# Altium PCB STLINK.PcbDoc
Units mil, origin at the board's own origin, x right, y up, seen from the top; angles counter-clockwise.
Board outline 1677.17 x 669.29 mil, 2 copper layers (Top Layer, Bottom Layer); 30 components, 29 nets, 121 pads, 35 vias.
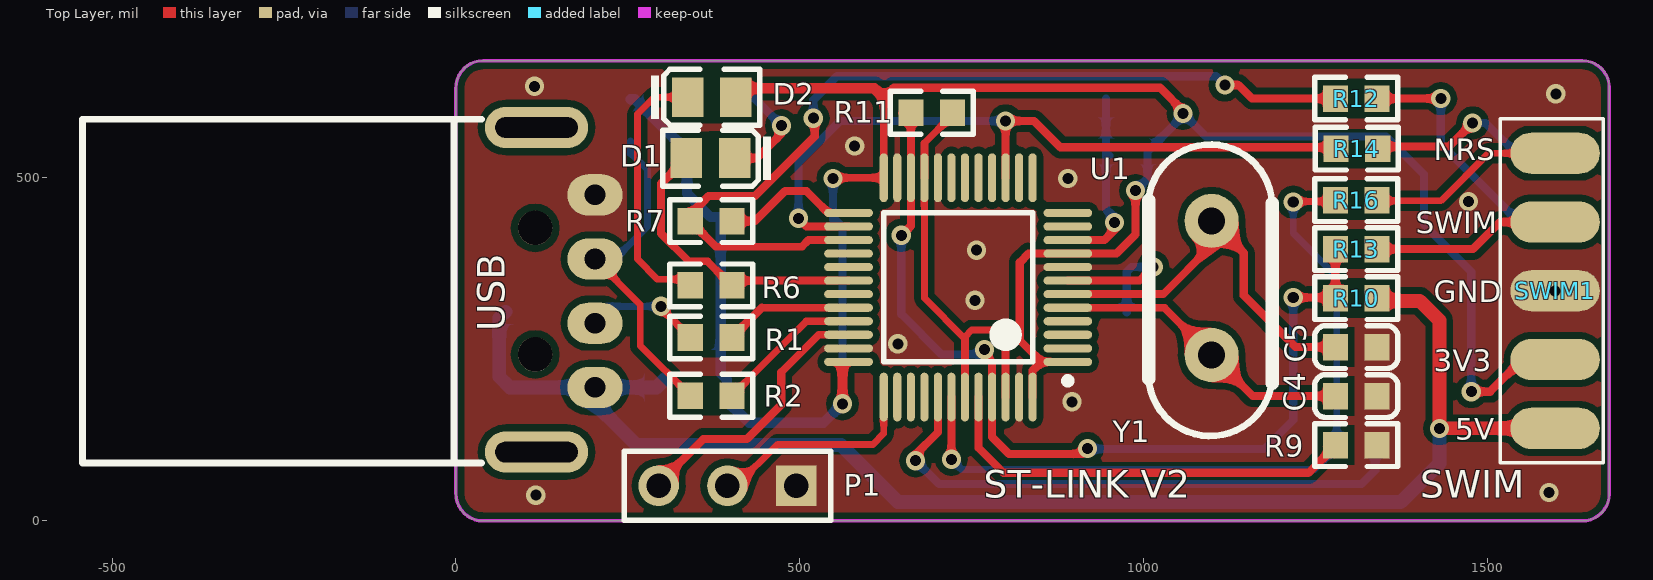
[diagram p0: Top Layer view]
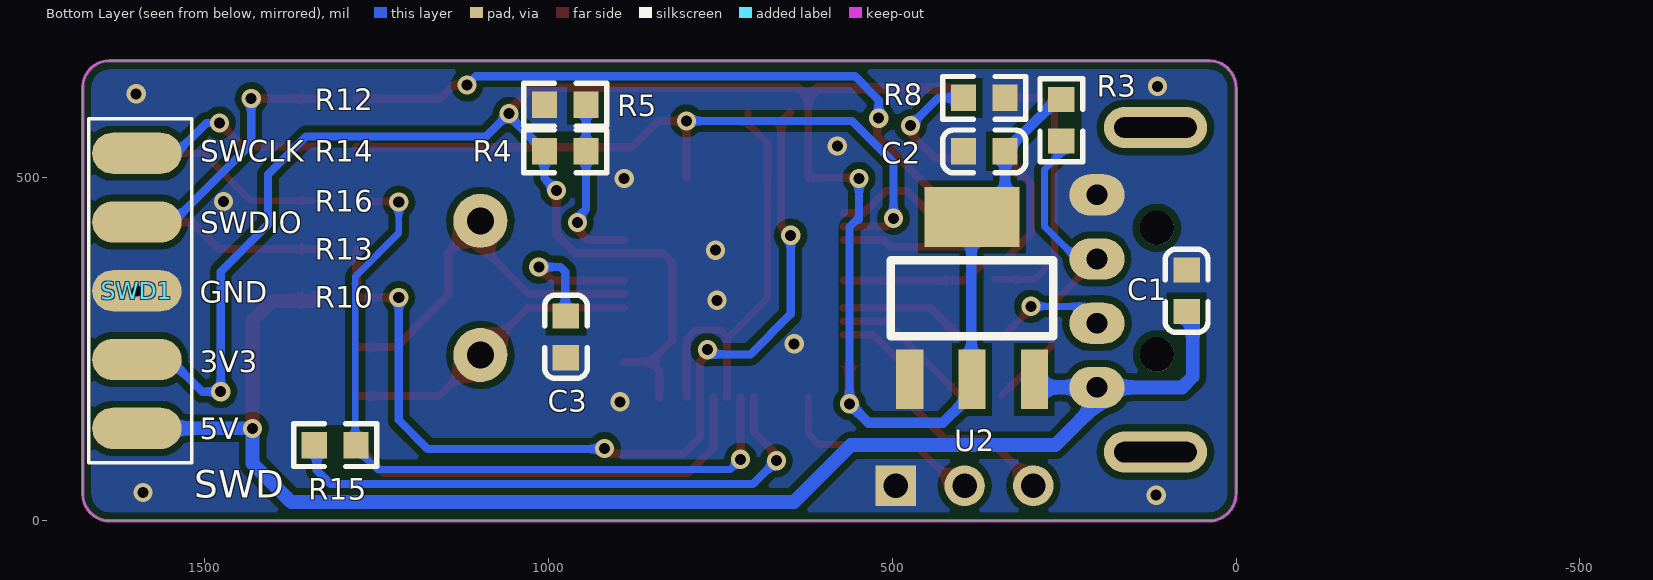
[diagram p1: Bottom Layer view, seen from below]
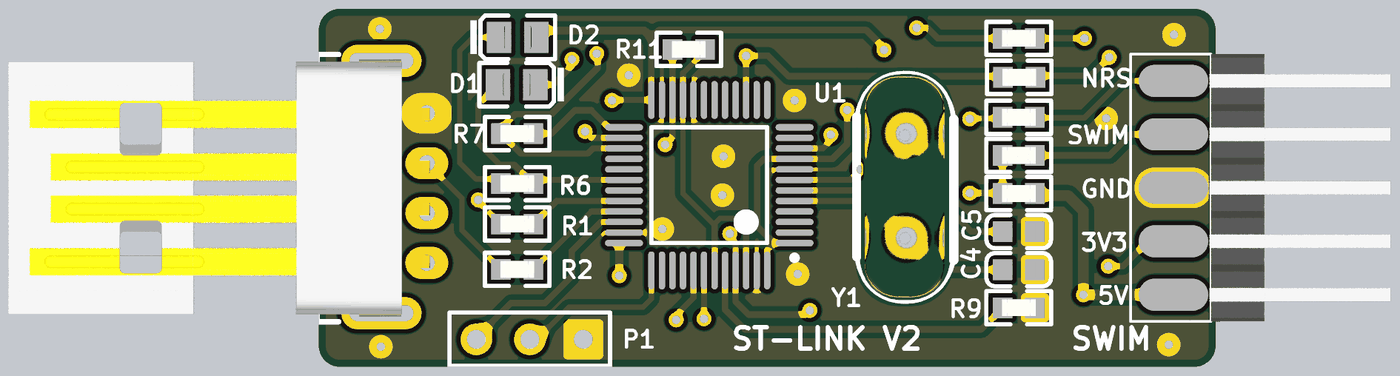
[diagram p2: 3D render of the assembled board from above, using the file's embedded part models]
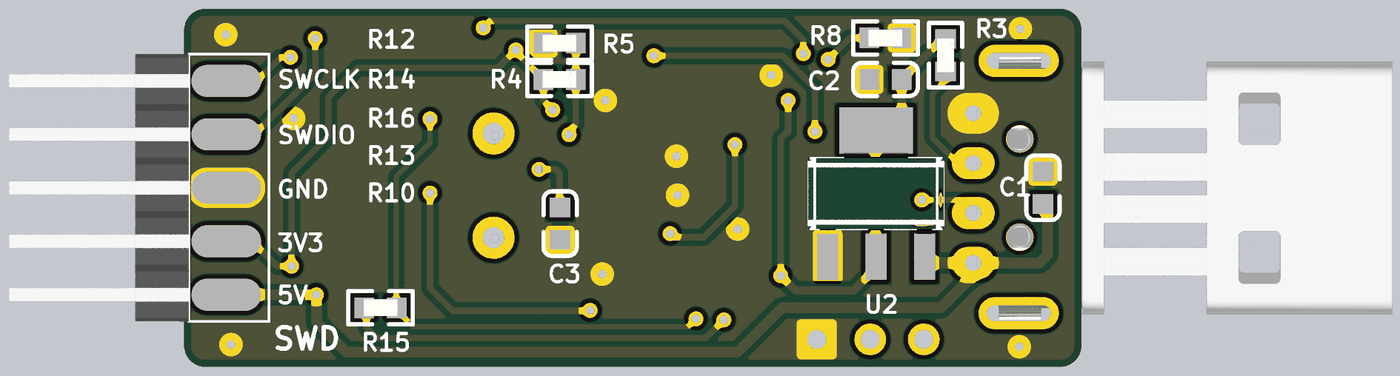
[diagram p3: 3D render of the assembled board from below, using the file's embedded part models]

## Layer stack, top to bottom
Top Solder: solder mask 0.4, Solder Resist, Dk 3.5
Top Layer: signal copper 1.4
Dielectric1: dielectric 12.6, FR-4, Dk 4.8
Bottom Layer: signal copper 1.4
Bottom Solder: solder mask 0.4, Solder Resist, Dk 3.5

## Board outline
0,39.37 ccw(c39.37,39.37) 39.37,0 1637.8,0 ccw(c1637.8,39.37) 1677.17,39.37 1677.17,629.92 ccw(c1637.8,629.92) 1637.8,669.29 39.37,669.29 ccw(c39.37,629.92) 0,629.92

## Design rules (kind name [scope] priority, off if disabled: settings)
Clearance [All] p1: gap=8 ignorepadtopadclearanceinfootprint=TRUE
ComponentClearance [All] p1: gap=0 collisioncheckmode=3 verticalgap=0 showdistances=FALSE
HoleSize [All] p1: absolutevalues=TRUE maxlimit=200 minlimit=1 maxpercent=80.000 minpercent=20.000
HoleToHoleClearance [All] p1: gap=10 allowstackedmicrovias=FALSE
MinimumSolderMaskSliver [All] p1: minsoldermaskwidth=2
PlaneClearance [All] p1: clearance=6
PlaneConnect [All] p1: planeconnectstyle=Direct reliefexpansion=20 reliefentries=4 reliefconductorwidth=10 reliefairgap=10
PolygonConnect [All] p1: connectstyle=Direct reliefconductorwidth=10 reliefentries=4 polygonreliefangle="90 Angle" airgapwidth=10
RoutingVias [All] p1: holewidth=16 width=28 viastyle="Through Hole" minholewidth=0 minwidth=0 maxholewidth=28 maxwidth=80
SilkToSilkClearance [All] p1: silktosilkclearance=4
SilkToSolderMaskClearance [IsPad] p1: minsilkscreentomaskgap=0 clearancetoexposedcopper=TRUE
SolderMaskExpansion [All] p1: expansion=8
Width [All] p1: maxlimit=50 minlimit=10 preferedwidth=12 minimp=50.000000 maximp=50.000000 favimp=50.000000
22 further rules are at their usual default settings.

## Components (designator, comment, footprint, x,y, rotation, side; value= is the part's Value field where it differs from the comment)
C1 "104" 0603_C 71.85,334.65 r270 bottom
C2 "104" 0603_C 366.14,537.4 r180 bottom
C3 "104" 0603_C 974.41,267.72 r90 bottom
C4 "22pf" 0603_C 1309.06,181.5 r180 top value=22p
C5 "22pf" 0603_C 1309.06,252.76 r180 top value=22p
D1 "红灯 0805" LC-0805_LED_S1 370.08,527.56 r180 top
D2 "绿灯 0805" LC-0805_LED_S1 372.05,616.14 r0 top
P1 "ST-LINK" HDR1X3 494.69,51.18 r180 top
R1 "22R" 0603_R 371.06,266.73 r0 top value=22
R2 "22R" 0603_R 371.06,182.09 r0 top value=22
R3 "1.5k" 0603_R 253.94,582.68 r90 bottom
R4 "4.7k" 0603_R 975.39,537.4 r0 bottom
R5 "4.7k" 0603_R 975.39,605.32 r180 bottom
R6 "1.5k" 0603_R 371.06,342.52 r0 top
R7 "100R" 0603_R 371.06,436.02 r0 top value=100
R8 "1.5k" 0603_R 366.14,615.16 r0 bottom
R9 "10k" 0603_R 1309.06,110.24 r180 top
R10 "1.5k" 0603_R 1309.06,324.02 r180 top
R11 "1k" 0603_R 691.93,593.5 r180 top
R12 "22R" 0603_R 1309.06,614.17 r180 top value=22
R13 "22R" 0603_R 1309.06,395.28 r180 top value=22
R14 "22R" 0603_R 1310.04,541.34 r180 top value=22
R15 "1k" 0603_R 1310.04,110.24 r180 bottom
R16 "22R" 0603_R 1309.06,466.54 r180 top value=22
SWD1 "Head5" "HEADER 5" 1598.43,534.65 r270 bottom
SWIM1 "Header 5" "HEADER 5" 1598.43,134.65 r90 top
U1 "STM32F103C8T6" LQFP48_N 730.31,339.57 r180 top
U2 "AMS1117-3.3" SOT-223 383.86,323.82 r270 bottom
USB "USB" USB_A_G 197.16,484.12 r270 top (schematic designator USB?)
Y1 "8M晶振" XTAL_2 1097.44,351.38 r270 top

## Footprints (in the part's own frame and the unit in brackets; to place one, negate y for a bottom-side part, rotate by r counter-clockwise, add the part's x,y. Pads: shape width x height; smd on the part's side, far side on the other; paste and mask are expansions set on the pad)
0603_C [mm]
  rect 0.93x0.98 smd: 1(-0.77,0) 2(0.77,0)
  silkscreen extent -1.54,-0.79 1.54,0.79, body extent -0.8,-0.4 0.8,0.4, height 0.3
0603_R [mm]
  rect 0.93x0.98 smd: 1(-0.77,0) 2(0.77,0)
  silkscreen extent -1.53,-0.79 1.54,0.79, body extent -0.85,-0.4 0.85,0.4, height 0.56
HDR1X3 [mm] "Connector; Header; 3 Position"
  rect 1.5x1.5 hole 0.9: 1(0,0)
  round 1.5 hole 0.9: 2(2.54,0) 3(5.08,0)
  silkscreen extent -1.27,-1.27 6.35,1.27
"HEADER 5" [mil]
  oval 60x130 smd: 1(0,0) 2(100,0) 3(200,0) 4(300,0) 5(400,0)
  silkscreen extent -50,-70 450,80, body extent -50,-406 450,48, height 70
LC-0805_LED_S1 [mm]
  rect 1.16x1.47 smd: A(0.89,0) K(-0.89,0)
  silkscreen extent -2.24,-1.03 1.77,1.04, body extent -1.01,-0.62 1.01,0.62, height 1.1
LQFP48_N [mm] "Thin QFP, 48-Leads, Body 7x7mm, Pitch 0.5mm, IPC Medium Density"
  oval 1.8x0.3 smd: 1(-4.05,2.75) 2(-4.05,2.25) 3(-4.05,1.75) 4(-4.05,1.25) 5(-4.05,0.75) 6(-4.05,0.25) 7(-4.05,-0.25) 8(-4.05,-0.75) 9(-4.05,-1.25) 10(-4.05,-1.75) 11(-4.05,-2.25) 12(-4.05,-2.75) 25(4.05,-2.75) 26(4.05,-2.25) 27(4.05,-1.75) 28(4.05,-1.25) 29(4.05,-0.75) 30(4.05,-0.25) 31(4.05,0.25) 32(4.05,0.75) 33(4.05,1.25) 34(4.05,1.75) 35(4.05,2.25) 36(4.05,2.75)
  oval 0.3x1.8 smd: 13(-2.75,-4.05) 14(-2.25,-4.05) 15(-1.75,-4.05) 16(-1.25,-4.05) 17(-0.75,-4.05) 18(-0.25,-4.05) 19(0.25,-4.05) 20(0.75,-4.05) 21(1.25,-4.05) 22(1.75,-4.05) 23(2.25,-4.05) 24(2.75,-4.05) 37(2.75,4.05) 38(2.25,4.05) 39(1.75,4.05) 40(1.25,4.05) 41(0.75,4.05) 42(0.25,4.05) 43(-0.25,4.05) 44(-0.75,4.05) 45(-1.25,4.05) 46(-1.75,4.05) 47(-2.25,4.05) 48(-2.75,4.05)
  silkscreen extent -4.18,-2.75 2.75,3.57, body extent -3.5,-3.5 3.5,3.5, height 1.6
SOT-223 [mm]
  rect 2.2x1 smd: 1(3,-2.3) 2(3,0) 3(3,2.3)
  rect 2.2x3.5 smd: 2(-3,0)
  silkscreen extent -1.4,-3 1.4,3, body extent -3.49,-3.24 3.49,3.24, height 1.64
USB_A_G [mil]
  oval 60x80 hole 30: 1(10,5) 2(103.33,5) 3(196.66,5) 4(290,5)
  oval 60x150 hole 30 slot 120 at 90 deg: 5(-88,-80) 6(384,-80)
  round 50 hole 50: 7(58,-82) 8(242,-82)
  silkscreen extent -100,-740 400,-160, body extent -96,-778 396,10, height 178
XTAL_2 [mm]
  round 2 hole 1: 1(-2.157,0.035) 2(2.796,0.035)
  silkscreen extent -4.98,-2.3 5.79,2.27, body extent -5.29,-2.36 6.06,2.29, height 3.5

## Part data
C1 C2 C3 C4 C5: library part Cap
D1 D2: library part "0805 蓝灯", "发光二极管", Package=0805, SuppliersPartNumber=C2293, ComponentLink1Description=供应商链接, ComponentLink1URL=http://www.szlcsc.com/product/details_2666.html, Supplier=LC
P1: library part "Header 3", "Header, 3-Pin", LatestRevisionDate=17-Jul-2002, LatestRevisionNote="Re-released for DXP Platform.", Publisher="Altium Limited"
R1 R2 R3 R4 R5 R6 R7 R8 R9 R10 R11 R12 R13 R14 R15 R16: library part RES
SWD1: library part "HEAD 5"
SWIM1: "Header, 5-Pin", LatestRevisionDate=17-Jul-2002, LatestRevisionNote="Re-released for DXP Platform.", Publisher="Altium Limited"
U1: "STM32 ARM-based 32-bit MCU with 64 Kbytes Flash, 48-pin LQFP, Industrial Temperature", ComponentLink1Description="Manufacturer Link", ComponentLink1URL=www.st.com/stm32, ComponentLink2Description=Datasheet, ComponentLink2URL=http://www.st.com/stonline/products/literature/ds/13587.pdf, DatasheetVersion="rev6, Mar-2008", PackageDescription="48-Pin Low-Profile Quad Flat Pack, 7 x 7 mm Body, 0.5 mm Pitch (LQFP48)", PackageReference=LQFP48, PackageVersion=Mar-2008, Published=30-May-2008, Publisher="Altium Limited"
U2: library part AMS1117-XX, "AMS   800mA LOW DROPOUT VOLTAGE REGULATOR"
USB: library part USB_G
Y1: library part XTAL

## Via types
v1: diameter 28, hole 16, Top Layer to Bottom Layer, 35 vias

## Nets (pads, with @x,y where several pads share a name; then routed paths per layer and width w, separated by ;. In a path a pad name is that pad's centre, name@x,y a point inside that pad or via, vN(x,y) a via of type N, cw(c..) or ccw(c..) an arc to the next point about the centre after c; other vN are vias at no path point)
3V3: C2.2 D2.A R3.2 R4.2 SWD1.4 SWIM1.2 U1.1 U1.9 U1.24 U1.36 U1.48 U2.2 | length 3633.6
  Top Layer w11.5: v1@549.21,499.02 U1.24 622.05,615.16 ; 819.88,262.8 851.38,231.3 ; 832.68,388.78 U1.9 960.63,388.78 ; U1.48 838.58,218.5 851.38,231.3 ; U1.1 851.38,231.3
  Top Layer w12: v1(548.23,498.03) v1@549.21,499.02 ; 622.05,615.16 636.81,629.92 1023.62,629.92 1057.09,596.46 v1(1057.09,592.52) ; 819.88,262.8 819.88,375.98 832.68,388.78 ; 960.63,388.78 988.19,416.34 v1(988.19,480.32) ; v1(1476.38,187.99) 1503.94,187.99 1550.59,234.65 SWIM1.2
  Top Layer w15: D2.A 419.88,628.94 608.27,628.94 622.05,615.16 ; v1(562.01,170.28) U1.36@562.01,228.35
  Bottom Layer w12: v1(548.23,498.03) 548.23,437.99 549.71,439.47 562.01,427.17 v1(562.01,170.28) ; v1(988.19,480.32) 1005.71,497.83 R4.2 1063.78,595.47 1063.78,585.82 1090.55,559.06 1352.48,559.06 1407.48,504.06 1407.48,431.1 1476.38,362.2 v1(1476.38,187.99) 1503.48,187.99 1550.13,234.65 SWD1.4
  Bottom Layer w15: R3.2 260.24,612.99 C2.2 335.83,476.18 370.08,441.93 383.86,441.93 384.84,441.93 384.84,214.57 393.7,205.71 393.7,175.2 426.18,142.72 534.45,142.72 v1(562.01,170.28)
5V0: C1.2 R10.1 SWD1.5 SWIM1.1 U2.3 USB.4 | length 2332
  Top Layer w20: R10.1 1343.51,319.88 1401.57,319.88 1430.12,291.34 1430.12,134.65 SWIM1.1
  Bottom Layer w20: C1.2 62.99,295.47 62.99,209.65 78.51,194.13 USB.4 ; U2.3@303.15,205.71 291.57,194.13 USB.4 ; SWD1.5 1430.31,134.65 v1(1430.12,134.45) 1430.12,83.66 1374.02,27.56 642.72,27.56 559.95,110.33 262.71,110.33 202.16,170.87 USB.4
(NRS): R16.1 SWIM1.5 | length 284.7
  Top Layer w10: R16.1@1342.32,465.55 1432.09,465.55 1501.18,534.65 SWIM1.5
(SWCLK): R14.1 SWD1.1 | length 292.4
  Top Layer w12: R14.1@1338.58,544.29 1443.9,544.29 v1(1478.35,578.74)
  Bottom Layer w12: v1(1478.35,578.74) 1497.05,578.74 1541.14,534.65 SWD1.1
(SWDIO): R12.1 SWD1.2 | length 372
  Top Layer w12: R12.1 v1(1432.09,614.17)
  Bottom Layer w12: v1(1432.09,614.17) 1432.09,548.23 1545.67,434.65 SWD1.2
(SWIM): R13.1 SWIM1.4 | length 275.4
  Top Layer w12: R13.1 1478.94,395.28 1518.31,434.65 SWIM1.4
BOOT0: R9.2 U1.44 | length 625.5
  Top Layer w11.5: U1.44 759.84,106.3 796.26,69.88
  Top Layer w12: 796.26,69.88 1239.37,69.88 R9.2@1279.73,110.24
GNDG: C1.1 C2.1 C3.1 C4.1 C5.1 P1.1 R5.1 R8.1 R9.1 SWD1.3 SWIM1.3 U1.8 U1.20 U1.23 U1.35 U1.47 U2.1 USB.1
  other v1: 116.14,37.4 1589.57,41.34 895.67,173.23 642.5,257.5 754.92,320.87 1598.43,334.65 756.89,393.7 1472.44,464.57 889.76,498.03 579.73,545.28 1599.41,621.06 114.17,631.89
NetC3_2: C3.2 U1.7 | length 232.5
  Top Layer w11.5: U1.7 994.1,349.41 v1(1013.78,369.09)
  Bottom Layer w12: C3.2@975.39,303.15 975.39,362.2 982.28,369.09 v1(1013.78,369.09)
NetD1_K: D1.K R8.2 | length 188.5
  Top Layer w12: D1.K 437.99,527.56 473.43,562.99 v1(473.43,574.8)
  Bottom Layer w12: R8.2 433.07,615.16 v1(473.43,574.8)
NetD2_K: D2.K R6.1 | length 394.1
  Top Layer w10: D2.K 288.39,616.14 263.78,591.54 263.78,380.91 293.31,351.38 R6.1@351.58,351.38
NetR1_1: R1.1 USB.3 | length 177.8
  Top Layer w10: v1(298.24,312.02) v1@300.18,312.02 ; v1@300.2,312.01 295.47,312.01 R1.1
  Bottom Layer w10: USB.3 227.69,312.99 228.66,312.02 v1(298.24,312.02)
NetR2_1: R2.1 R3.1 USB.2 | length 486.5
  Top Layer w10: USB.2 267.91,315.04 267.91,254.92 R2.1
  Bottom Layer w10: USB.2 231.19,380.79 278.54,428.15 278.54,510.83 253.94,535.43 R3.1
NetR4_1: R4.1 R5.2 U1.10 | length 275.3
  Top Layer w11.5: U1.10 942.92,408.47 v1@959.65,425.2
  Top Layer w12: v1@959.65,425.2 v1@959.65,434.06
  Bottom Layer w12: R5.2@945.08,614.17 R4.1 945.08,453.54 v1@965.55,433.07
  other v1: 957.68,434.06
OS_IN: C4.2 U1.5 Y1.2 | length 442.2
  Top Layer w11.5: U1.5 1030.08,310.04 Y1.2
  Top Layer w12: Y1.2 1158.62,181.5 C4.2
OS_OUT: C5.2 U1.6 Y1.1 | length 566.5
  Top Layer w11.5: U1.6 1028.55,329.73 Y1.1@1098.82,400
  Top Layer w12: Y1.1@1098.82,400 Y1.1 1145.67,389.44 1145.67,327.76 1220.67,252.76 C5.2
RX: D1.A R6.2 U1.30 | length 425.9
  Top Layer w11.5: D1.A 298.23,490.75 298.23,417.94 338.61,377.56 365.58,377.56 393.73,349.41 U1.30
SWCLK1: P1.2 U1.37 | length 311.9
  Top Layer w10: P1.2 407.48,51.18 467.52,111.22 606.3,111.22 622.05,126.97 U1.37
SWDIO1: P1.3 U1.34 | length 393.5
  Top Layer w11.5: 472.96,216.07 527.56,270.67 U1.34
  Top Layer w12: P1.3@294.69,54.13 359.65,119.09 423.23,119.09 472.96,168.82 472.96,216.07
SWIM: R10.2 R11.2 R13.2 U1.22 U1.45 | length 1352.5
  Top Layer w11.5: 661.42,429.13 U1.22 R11.2@661.42,580.91 ; v1@768.7,242.13 779.53,231.3 U1.45 779.53,122.05 804.14,97.44
  Top Layer w12: v1(647.64,415.35) 661.42,429.13 ; R11.2@648.82,593.5 R11.2@661.42,580.91 ; 804.14,97.44 910.43,97.44 v1(918.31,105.32) ; v1(1217.52,324.8) 1278.37,324.8 1278.74,325.17 R13.2
  Bottom Layer w12: v1(647.64,415.35) 647.64,300.63 706.14,242.13 v1@768.7,242.13 ; v1(918.31,105.32) 919.1,104.53 1175.39,104.53 1217.52,146.65 v1(1217.52,324.8)
  other v1: 768.7,249.02
SWIM_IN: R11.1 U1.21 U1.43 U1.46 | length 605.6
  Top Layer w10: U1.21 681.1,323.82 740.16,264.77 740.16,267.72 750,277.56 786.42,277.56 799.21,264.76 ; 681.1,549.21 709.45,577.56 R11.1@709.45,593.5
  Top Layer w11.5: U1.21 681.1,549.21 ; U1.43 740.16,264.77 ; U1.46 799.21,264.76
SWIM_RST: R15.2 R16.2 U1.42 | length 1109.8
  Top Layer w10: v1@1220.47,464.57 R16.2@1276.77,464.57
  Top Layer w11.5: v1(720.47,89.57) U1.42
  Bottom Layer w10: v1(720.47,89.57) 735.48,74.56 1248.77,74.56 1280.71,106.5 1280.71,355.32 1217.52,418.5 v1(1217.52,463.58)
SWIM_RST_IN: R15.1 U1.41 | length 833.4
  Top Layer w11.5: v1@668.31,96.46 700.79,128.94 U1.41
  Top Layer w12: v1(668.31,87.6) v1@668.31,96.46
  Bottom Layer w12: v1(668.31,87.6) 702.35,53.56 1316.77,53.56 1336.62,73.4 R15.1@1336.62,110.24
T_JTCK: R14.2 U1.15 U1.26 | length 1064.4
  Top Layer w11.5: v1(498.03,439.96) 509.84,428.15 U1.26 ; U1.15 v1(799.21,581.69)
  Top Layer w12: v1(799.21,581.69) 840.55,581.69 878.94,543.31 R14.2@1279.73,543.31
  Bottom Layer w12: v1(498.03,439.96) 498.03,521.3 558.42,581.69 v1(799.21,581.69)
T_JTMS: R7.1 R12.2 U1.27 | length 1328.2
  Top Layer w11.5: R7.1 378.15,398.62 502.95,398.62 512.8,408.47 U1.27
  Top Layer w12: R7.1 340.75,446.06 367.13,472.44 435.04,472.44 521.65,559.06 521.65,581.69 519.71,583.64 v1(519.71,585.66) ; v1(1118.11,633.86) 1137.8,633.86 1157.48,614.17 R12.2
  Bottom Layer w12: v1(519.71,585.66) 519.71,612.23 554.13,646.65 1105.32,646.65 v1(1118.11,633.86)
T_SWDIO_IN: R7.2 U1.25 | length 200.8
  Top Layer w11.5: 509.45,479.72 541.34,447.84 U1.25
  Top Layer w12: R7.2 435.04,436.02 478.74,479.72 509.45,479.72
TX: U1.31
USB_DM: R1.2 U1.32 | length 187.4
  Top Layer w11.5: 444.69,310.04 U1.32
  Top Layer w12: R1.2 444.69,310.04
USB_DP: R2.2 U1.33 | length 214.3
  Top Layer w10: R2.2 482.09,262.8 509.65,290.36
  Top Layer w11.5: 509.65,290.36 U1.33
pads on no net: U1.2 U1.3 U1.4 U1.11 U1.12 U1.13 U1.14 U1.16 U1.17 U1.18 U1.19 U1.28 U1.29 U1.38 U1.39 U1.40 USB.5 USB.6 USB.7 USB.8

## Polygon pours and split planes (outlines as drawn)
GNDG on Top Layer "Top Layer-GNDG" (solid, pour order 8): 1677.17,0 1677.17,669.29 0,669.29 0,0
GNDG on Bottom Layer "Bottom Layer-GNDG" (solid, pour order 10): 608.27,669.29 449.8,669.29 -0.13,669.29 2.13,0 1677.17,0 1677.17,669.29

## Keep-outs
Keep-Out Layer:
  the board outline again, w5

## Silkscreen, mask and mechanical layers (free items; w line width, h text height)
Top Overlay:
  text "NRS" at 1421.91,524.61 h31.5
  text "SWIM" at 1395.67,418.31 h31.5
  text "GND" at 1421.91,317.91 h31.5
  text "3V3" at 1421.91,217.52 h31.5
  text "5V" at 1453.39,118.11 h31.5
  text "ST-LINK V2" at 767.72,33.46 h40
  text "SWIM" at 1402.5,33.46 h40
Bottom Overlay:
  text "SWCLK" at 1505.91,522.64 h31.5
  text "SWDIO" at 1505.91,418.31 h31.5
  text "GND" at 1506.89,316.93 h31.5
  text "3V3" at 1506.89,216.54 h31.5
  text "5V" at 1506.89,119.1 h31.5
  text "SWD" at 1515,33.46 h40
Mechanical 1:
  the board outline again, w5